# Altium PCB 主板-双BH(1).PcbDoc (part 3 of 13)
Units mm, origin at the board's own origin, x right, y up, seen from the top; angles counter-clockwise.
Board outline 97.69 x 103.45 mm, 2 copper layers (Top Layer, Bottom Layer); 78 components, 75 nets, 243 pads, 279 vias.
Unrouted connection lines stored in the file: 7.
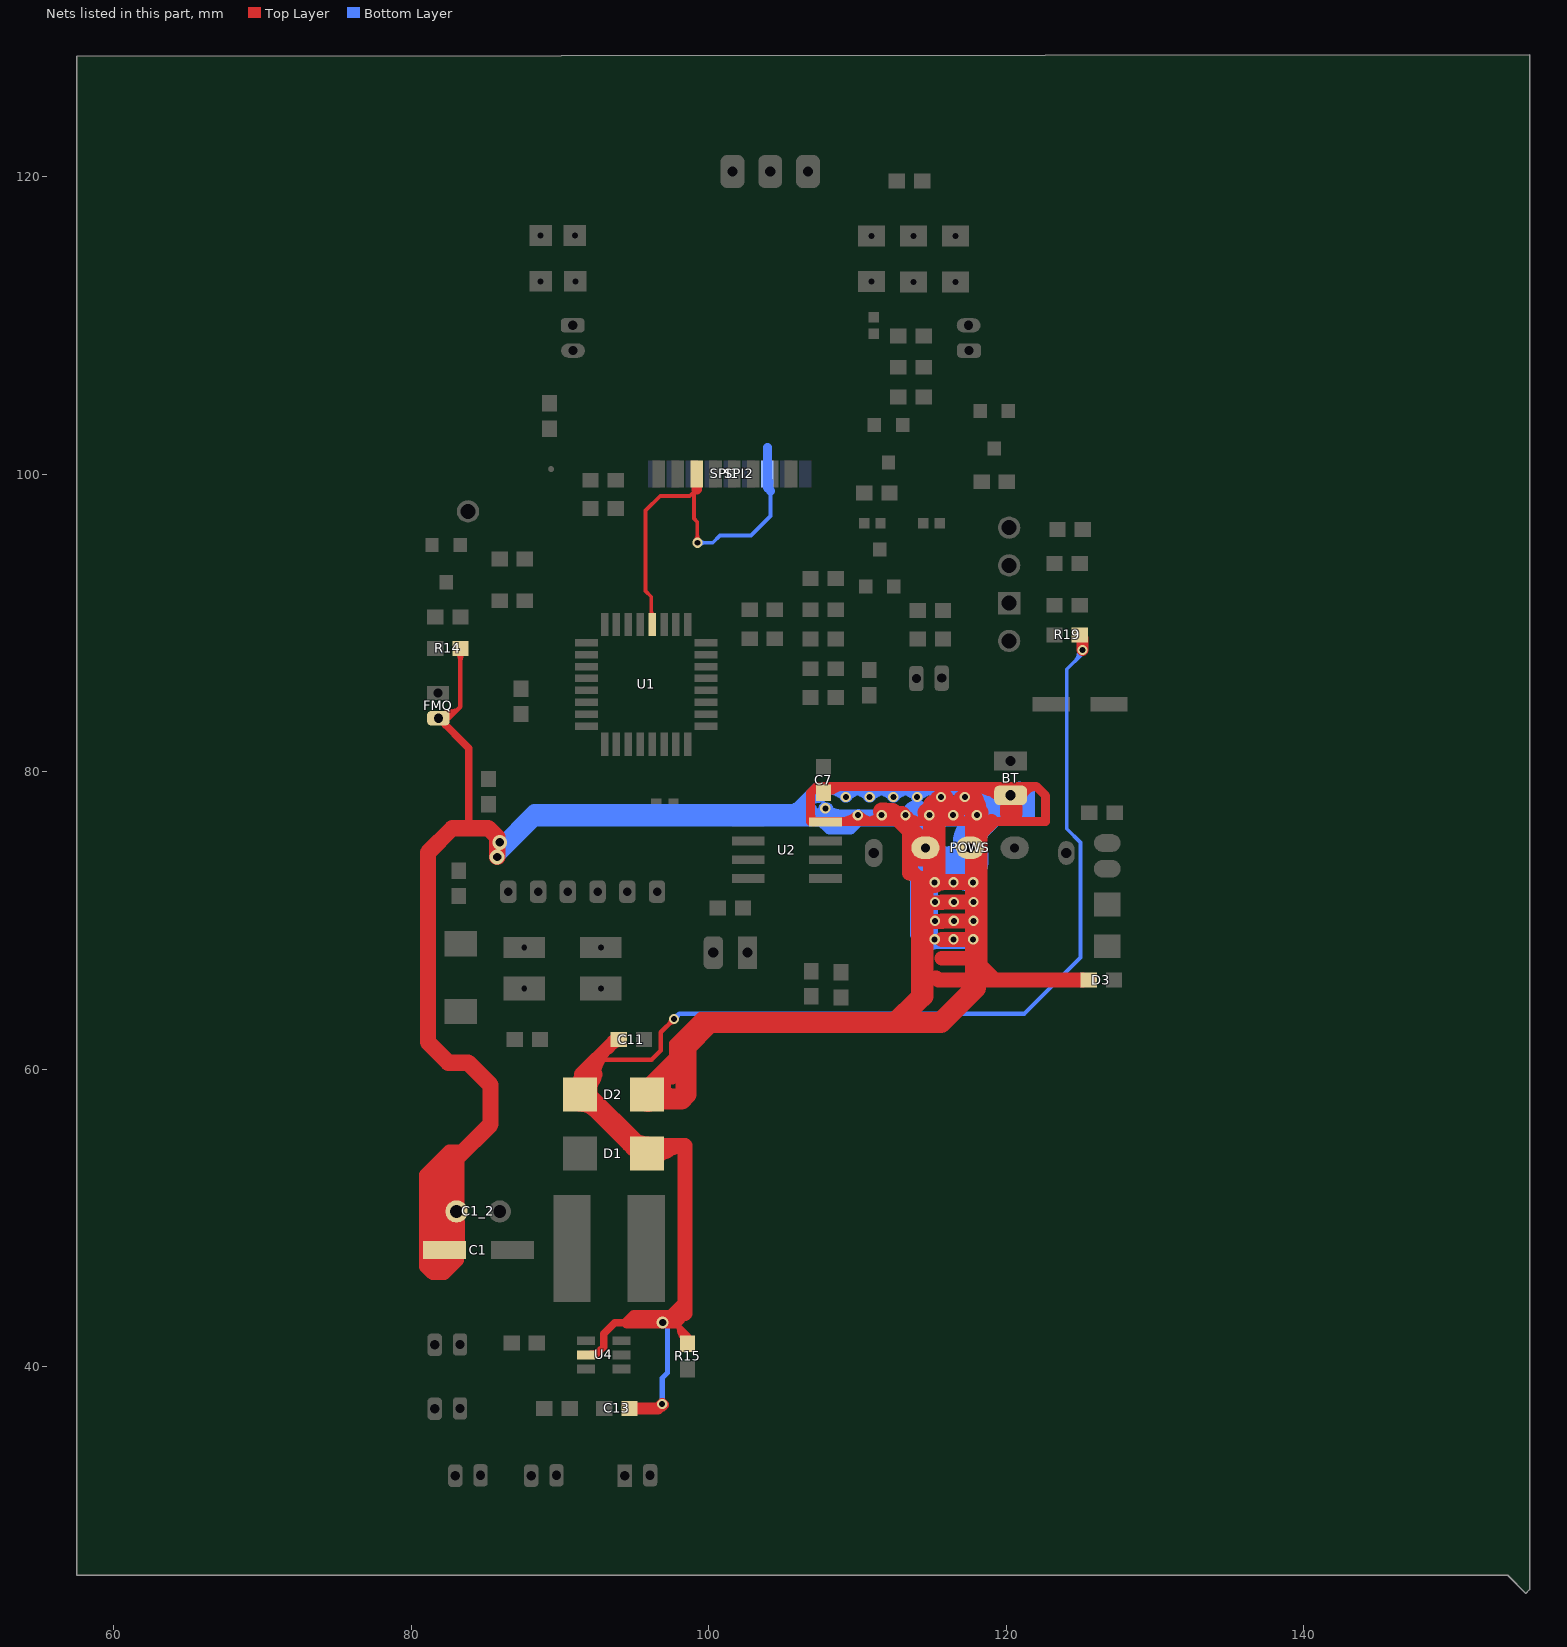
[diagram p3: the nets of this part, all layers, seen from the top]

## Via types
v1: diameter 0.7, hole 0.4, Top Layer to Bottom Layer, 108 vias
v2: diameter 0.68, hole 0.4, Top Layer to Bottom Layer, 87 vias
v3: diameter 0.8, hole 0.5, Top Layer to Bottom Layer, tented both sides, 33 vias
v4: diameter 0.6, hole 0.4, Top Layer to Bottom Layer, 12 vias
v5: diameter 0.9, hole 0.5, Top Layer to Bottom Layer, 8 vias
v6: diameter 0.8, hole 0.5, Top Layer to Bottom Layer, 6 vias
v7: diameter 1, hole 0.75, Top Layer to Bottom Layer, tented both sides, 5 vias
v8: diameter 3.4, hole 2.9, Top Layer to Bottom Layer, 4 vias
v9: diameter 1, hole 0.6, Top Layer to Bottom Layer, tented both sides, 3 vias
v10: diameter 1, hole 0.56, Top Layer to Bottom Layer, tented both sides, 2 vias
v11: diameter 1.1, hole 0.68, Top Layer to Bottom Layer, 2 vias
v12: diameter 0.8, hole 0.4, Top Layer to Bottom Layer, 2 vias
v13: diameter 0.65, hole 0.4, Top Layer to Bottom Layer, tented both sides, 2 vias
v14: diameter 1, hole 0.6, Top Layer to Bottom Layer, tented bottom, 1 vias
v15: diameter 0.7, hole 0.4, Top Layer to Bottom Layer, tented bottom, 1 vias
v16: diameter 0.95, hole 0.5, Top Layer to Bottom Layer, 1 vias
v17: diameter 0.64, hole 0.4, Top Layer to Bottom Layer, 1 vias
v18: diameter 0.62, hole 0.4, Top Layer to Bottom Layer, 1 vias

## Nets (pads, with @x,y where several pads share a name; then routed paths per layer and width w, separated by ;. In a path a pad name is that pad's centre, name@x,y a point inside that pad or via, vN(x,y) a via of type N, cw(c..) or ccw(c..) an arc to the next point about the centre after c; other vN are vias at no path point) (continued)
BT: BT.1 C1.2 C1_2.2 C7.2 D2.2 D3.1 FMQ.2 POWS.2 POWS.3 R14.1 U2.4 | length 983.1
  Top Layer w0.3: FMQ.2@81.661,83.605 82.538,83.605 83.31,84.377 R14.1@83.31,88.366 ; FMQ.2@81.797,83.546 ccw(c81.797,84.827) 82.702,83.922 ; FMQ.2@81.822,83.699 ccw(c81.822,84.98) 82.728,84.074 ; FMQ.2@81.934,83.574 cw(c82.718,83.258) 82.499,84.074 ; FMQ.2@82.025,83.724 ccw(c82.025,85.005) 82.931,84.099 ; R14.1@83.063,88.053 cw(c82.465,87.455) 83.31,87.455 ; R14.1@83.063,88.053 cw(c82.465,87.455) 83.31,87.455 ; R14.1@83.063,88.053 cw(c82.465,87.455) 83.31,87.455 ; 83.31,87.455 cw(c84.155,87.455) R14.1@83.557,88.053 ; 83.31,87.455 cw(c84.155,87.455) R14.1@83.557,88.053 ; 83.31,87.455 cw(c84.155,87.455) R14.1@83.557,88.053 ; FMQ.2@81.909,83.345 cw(c82.693,83.029) 82.474,83.845 ccw(c82.693,83.029) FMQ.2@81.909,83.345
  Top Layer w0.5: FMQ.2@81.9,83.56 83.871,81.589 83.871,76.048 ; 97.257,58.344 97.244,58.331 97.233,58.342 97.233,59.233 97.587,59.233 97.587,59.782 ; 97.587,60.655 97.587,61.747 ; 98.273,61.341 98.273,62.433 97.587,61.747 ; 98.984,63.144 100.076,63.144 100.416,63.144 100.873,63.602 99.441,63.602 97.587,61.747 ; FMQ.2@82.161,83.605 ccw(c82.902,83.605) 82.378,83.082 ; FMQ.2@82.161,83.605 ccw(c82.902,83.605) 82.378,83.082 ; FMQ.2@82.161,83.605 ccw(c82.902,83.605) 82.378,83.082
  Top Layer w0.6: C7.2@107.902,78.561 cw(c108.276,78.377) 108.313,78.792 ; 106.858,77.101 ccw(c107.528,77.101) U2.4@107.054,76.627 ; 106.858,77.101 ccw(c107.528,77.101) U2.4@107.054,76.627 ; 106.858,77.101 ccw(c107.528,77.101) U2.4@107.054,76.627 ; C7.2@107.791,78.838 ccw(c108.1,79.684) 108.55,78.904 ; C7.2@107.791,78.838 ccw(c108.1,79.684) 108.55,78.904 ; C7.2@107.791,78.838 ccw(c108.1,79.684) 108.55,78.904 ; C7.2@107.864,78.509 cw(c109.098,77.275) 109.098,79.019 ; C7.2@107.864,78.509 cw(c109.098,77.275) 109.098,79.019 ; C7.2@107.864,78.509 cw(c109.098,77.275) 109.098,79.019 ; U2.4@108.869,76.657 ccw(c108.869,78.252) v1@109.997,77.124 ; U2.4@108.869,76.657 ccw(c108.869,78.252) v1@109.997,77.124 ; U2.4@108.869,76.657 ccw(c108.869,78.252) v1@109.997,77.124 ; v1@110.068,77.124 ccw(c111.196,78.252) 111.196,76.657 ; v1@110.068,77.124 ccw(c111.196,78.252) 111.196,76.657 ; v1@110.068,77.124 ccw(c111.196,78.252) 111.196,76.657 ; 110.469,76.657 ccw(c110.469,78.252) v1@111.597,77.124 ; 110.469,76.657 ccw(c110.469,78.252) v1@111.597,77.124 ; 110.469,76.657 ccw(c110.469,78.252) v1@111.597,77.124 ; v1@111.668,77.124 ccw(c112.796,78.252) 112.796,76.657 ; v1@111.668,77.124 ccw(c112.796,78.252) 112.796,76.657 ; v1@111.668,77.124 ccw(c112.796,78.252) 112.796,76.657 ; 112.069,76.657 ccw(c112.069,78.252) v1@113.197,77.124 ; 112.069,76.657 ccw(c112.069,78.252) v1@113.197,77.124 ; 112.069,76.657 ccw(c112.069,78.252) v1@113.197,77.124 ; v1@113.268,77.124 ccw(c114.396,78.252) 114.396,76.657 ; v1@113.268,77.124 ccw(c114.396,78.252) 114.396,76.657 ; v1@113.268,77.124 ccw(c114.396,78.252) 114.396,76.657 ; 113.669,76.657 ccw(c113.669,78.252) v1@114.797,77.124 ; 113.669,76.657 ccw(c113.669,78.252) v1@114.797,77.124 ; 113.669,76.657 ccw(c113.669,78.252) v1@114.797,77.124 ; v1@114.868,77.124 ccw(c115.996,78.252) 115.996,76.657 ; v1@114.868,77.124 ccw(c115.996,78.252) 115.996,76.657 ; v1@114.868,77.124 ccw(c115.996,78.252) 115.996,76.657 ; 115.269,76.657 ccw(c115.269,78.252) v1@116.397,77.124 ; 115.269,76.657 ccw(c115.269,78.252) v1@116.397,77.124 ; 115.269,76.657 ccw(c115.269,78.252) v1@116.397,77.124 ; v1@116.468,77.124 ccw(c117.596,78.252) 117.596,76.657 ; v1@116.468,77.124 ccw(c117.596,78.252) 117.596,76.657 ; v1@116.468,77.124 ccw(c117.596,78.252) 117.596,76.657 ; 116.869,76.657 ccw(c116.869,78.252) v1@117.997,77.124 ; 116.869,76.657 ccw(c116.869,78.252) v1@117.997,77.124 ; 116.869,76.657 ccw(c116.869,78.252) v1@117.997,77.124 ; 117.563,79.019 cw(c117.563,76.135) BT.1@119.602,78.175 ; 117.563,79.019 cw(c117.563,76.135) BT.1@119.602,78.175 ; 117.563,79.019 cw(c117.563,76.135) BT.1@119.602,78.175 ; v1@118.072,77.12 ccw(c119.024,77.869) 119.024,76.657 ; v1@118.072,77.12 ccw(c119.024,77.869) 119.024,76.657 ; v1@118.072,77.12 ccw(c119.024,77.869) 119.024,76.657 ; 118.478,78.823 ccw(c119.176,80.032) BT.1@119.715,78.745 ; 118.478,78.823 ccw(c119.176,80.032) BT.1@119.715,78.745 ; 118.478,78.823 ccw(c119.176,80.032) BT.1@119.715,78.745 ; 119.011,79.019 cw(c119.011,77.583) BT.1@120.027,78.599 ; 119.011,79.019 cw(c119.011,77.583) BT.1@120.027,78.599 ; 119.011,79.019 cw(c119.011,77.583) BT.1@120.027,78.599 ; 119.024,76.657 115.164,76.657 113.005,76.657 106.858,76.657 106.858,78.588 107.29,79.019 122.022,79.019 ; 119.024,76.657 122.657,76.657 122.657,78.384 122.022,79.019 ; BT.1@119.361,78.837 cw(c119.606,78.764) BT.1@119.606,79.019 ; BT.1@119.361,78.837 cw(c119.606,78.764) BT.1@119.606,79.019 ; BT.1@119.361,78.837 cw(c119.606,78.764) BT.1@119.606,79.019 ; BT.1@119.936,78.665 cw(c120.411,78.523) BT.1@120.411,79.019 ; BT.1@119.936,78.665 cw(c120.411,78.523) BT.1@120.411,79.019 ; BT.1@119.936,78.665 cw(c120.411,78.523) BT.1@120.411,79.019 ; BT.1@120.51,78.494 cw(c121.216,78.283) BT.1@121.216,79.019 ; BT.1@120.51,78.494 cw(c121.216,78.283) BT.1@121.216,79.019 ; BT.1@120.51,78.494 cw(c121.216,78.283) BT.1@121.216,79.019 ; BT.1@121.085,78.322 cw(c122.022,78.042) 122.022,79.019 ; BT.1@121.085,78.322 cw(c122.022,78.042) 122.022,79.019 ; BT.1@121.085,78.322 cw(c122.022,78.042) 122.022,79.019
  Top Layer w1: C1.2@81.509,47.676 81.61,47.676 81.61,52.578 ; 82.067,47.092 82.067,53.636 ; 82.809,49.602 cw(c83.521,49.602) C1_2.2@83.172,50.224 ; 82.809,51.246 ccw(c83.462,51.246) C1_2.2@83.164,50.664 ; C1.2@83.05,48.336 83.05,47.185 82.194,46.33 81.458,46.33 ; C1_2.2@83.05,49.727 C1_2.2@83.05,50.656 ; 83.515,54.432 82.575,54.432 81.026,52.883 81.026,46.761 81.458,46.33 ; v1@114.859,72.517 115.672,72.517 ; v1@114.884,69.926 115.697,69.926 ; v1@114.884,71.196 115.697,71.196 ; v1@115.164,72.644 117.373,72.644 ; 115.282,66.158 115.44,66 124.395,66 ; 115.672,67.462 117.881,67.462 ; 115.672,68.732 v1(116.459,68.732) v1(117.78,68.732) v1@117.881,68.732 ; 115.672,72.568 v1(116.459,72.568) v1(117.78,72.568) v1@117.881,72.568 ; 115.697,69.977 v1(116.484,69.977) v1(117.805,69.977) v1@117.907,69.977 ; 115.697,71.247 v1(116.484,71.247) v1(117.805,71.247) v1@117.907,71.247 ; 117.373,72.593 v1@117.615,72.834 ; POWS.2@118.012,74.969 cw(c118.634,75.169) 118.172,75.631 ; 119.024,76.657 118.262,75.895 ; D3.1@125.15,66 124.395,66 ; 81.026,46.744 cw(c82.483,46.744) C1.2@81.453,47.774 ; 81.026,46.744 cw(c82.483,46.744) C1.2@81.453,47.774 ; 81.026,46.744 cw(c82.483,46.744) C1.2@81.453,47.774 ; 81.026,48.946 ccw(c82.483,48.946) C1.2@81.453,47.916 ; 81.026,48.946 ccw(c82.483,48.946) C1.2@81.453,47.916 ; 81.026,48.946 ccw(c82.483,48.946) C1.2@81.453,47.916 ; C1.2@81.311,47.916 ccw(c80.589,48.637) 81.61,48.637 ; C1.2@81.311,47.916 ccw(c80.589,48.637) 81.61,48.637 ; C1.2@81.311,47.916 ccw(c80.589,48.637) 81.61,48.637 ; C1.2@81.453,47.775 ccw(c82.183,47.055) 81.458,46.33 ; C1.2@81.453,47.775 ccw(c82.183,47.055) 81.458,46.33 ; C1.2@81.453,47.775 ccw(c82.183,47.055) 81.458,46.33 ; 81.911,49.918 cw(c82.582,49.53) C1_2.2@82.936,50.219 ; 81.911,49.918 cw(c82.582,49.53) C1_2.2@82.936,50.219 ; 81.911,49.918 cw(c82.582,49.53) C1_2.2@82.936,50.219 ; 81.911,50.966 ccw(c82.582,51.353) C1_2.2@82.936,50.664 ; 81.911,50.966 ccw(c82.582,51.353) C1_2.2@82.936,50.664 ; 81.911,50.966 ccw(c82.582,51.353) C1_2.2@82.936,50.664 ; 82.067,47.206 cw(c82.871,47.206) C1.2@82.303,47.774 ; 82.067,47.206 cw(c82.871,47.206) C1.2@82.303,47.774 ; 82.067,47.206 cw(c82.871,47.206) C1.2@82.303,47.774 ; C1.2@82.067,47.466 cw(c86.026,47.466) C1_2.2@83.227,50.265 ; C1.2@82.067,47.466 cw(c86.026,47.466) C1_2.2@83.227,50.265 ; C1.2@82.067,47.466 cw(c86.026,47.466) C1_2.2@83.227,50.265 ; 82.067,48.484 ccw(c82.871,48.484) C1.2@82.303,47.916 ; 82.067,48.484 ccw(c82.871,48.484) C1.2@82.303,47.916 ; 82.067,48.484 ccw(c82.871,48.484) C1.2@82.303,47.916 ; 82.067,49.88 cw(c83.612,49.88) 82.52,50.972 ; 82.067,49.88 cw(c83.612,49.88) 82.52,50.972 ; 82.067,49.88 cw(c83.612,49.88) 82.52,50.972 ; 82.067,51.003 ccw(c83.612,51.003) 82.52,49.911 ; 82.067,51.003 ccw(c83.612,51.003) 82.52,49.911 ; 82.067,51.003 ccw(c83.612,51.003) 82.52,49.911 ; 82.067,53.418 ccw(c86.026,53.418) C1_2.2@83.227,50.619 ; 82.067,53.418 ccw(c86.026,53.418) C1_2.2@83.227,50.619 ; 82.067,53.418 ccw(c86.026,53.418) C1_2.2@83.227,50.619 ; 82.666,49.293 ccw(c81.429,50.007) C1_2.2@82.809,50.377 ; 82.666,49.293 ccw(c81.429,50.007) C1_2.2@82.809,50.377 ; 82.666,49.293 ccw(c81.429,50.007) C1_2.2@82.809,50.377 ; 82.666,51.59 cw(c81.429,50.876) C1_2.2@82.809,50.507 ; 82.666,51.59 cw(c81.429,50.876) C1_2.2@82.809,50.507 ; 82.666,51.59 cw(c81.429,50.876) C1_2.2@82.809,50.507 ; 113.487,73.205 cw(c115.057,73.205) POWS.3@114.468,74.66 ; 113.487,73.205 cw(c115.057,73.205) POWS.3@114.468,74.66 ; 113.487,73.205 cw(c115.057,73.205) POWS.3@114.468,74.66 ; 113.487,74.689 cw(c114.456,74.689) 114.093,75.587 ; 113.487,74.689 cw(c114.456,74.689) 114.093,75.587 ; 113.487,74.689 cw(c114.456,74.689) 114.093,75.587 ; 113.487,75.046 ccw(c114.393,75.046) 114.284,74.147 ; 113.487,75.046 ccw(c114.393,75.046) 114.284,74.147 ; 113.487,75.046 ccw(c114.393,75.046) 114.284,74.147 ; 113.487,76.175 ccw(c114.529,76.175) POWS.3@114.404,75.14 ; 113.487,76.175 ccw(c114.529,76.175) POWS.3@114.404,75.14 ; 113.487,76.175 ccw(c114.529,76.175) POWS.3@114.404,75.14 ; 113.487,76.175 113.487,73.457 114.351,72.593 ; 113.764,74.129 ccw(c113.218,74.853) POWS.3@114.124,74.883 ; 113.764,74.129 ccw(c113.218,74.853) POWS.3@114.124,74.883 ; 113.764,74.129 ccw(c113.218,74.853) POWS.3@114.124,74.883 ; 114.058,72.886 ccw(c115.189,74.018) v1@115.189,72.418 ; 114.058,72.886 ccw(c115.189,74.018) v1@115.189,72.418 ; 114.058,72.886 ccw(c115.189,74.018) v1@115.189,72.418 ; 114.351,72.593 ccw(c114.917,73.16) v1@115.252,72.431 ; 114.351,72.593 ccw(c114.917,73.16) v1@115.252,72.431 ; 114.351,72.593 ccw(c114.917,73.16) v1@115.252,72.431 ; POWS.2@117.597,74.715 cw(c115.991,73.109) 118.262,73.109 ; POWS.2@117.597,74.715 cw(c115.991,73.109) 118.262,73.109 ; POWS.2@117.597,74.715 cw(c115.991,73.109) 118.262,73.109 ; v1@117.615,72.834 117.945,72.834 118.237,73.127 ; v1@117.615,72.834 118.237,73.457 118.237,73.127 ; v1@117.63,72.568 cw(c118.31,72.568) 117.829,73.049 ; v1@117.63,72.568 cw(c118.31,72.568) 117.829,73.049 ; v1@117.63,72.568 cw(c118.31,72.568) 117.829,73.049 ; POWS.2@117.649,75.108 ccw(c116.935,76.345) 118.314,75.975 ; POWS.2@117.649,75.108 ccw(c116.935,76.345) 118.314,75.975 ; POWS.2@117.649,75.108 ccw(c116.935,76.345) 118.314,75.975 ; POWS.2@117.7,75.131 ccw(c117.462,75.895) 118.262,75.895 ; POWS.2@117.7,75.131 ccw(c117.462,75.895) 118.262,75.895 ; POWS.2@117.7,75.131 ccw(c117.462,75.895) 118.262,75.895 ; v1@117.856,72.439 ccw(c117.433,73.152) 118.262,73.152 ; v1@117.856,72.439 ccw(c117.433,73.152) 118.262,73.152 ; v1@117.856,72.439 ccw(c117.433,73.152) 118.262,73.152 ; v1@117.86,72.441 ccw(c117.425,73.127) 118.237,73.127 ; v1@117.86,72.441 ccw(c117.425,73.127) 118.237,73.127 ; v1@117.86,72.441 ccw(c117.425,73.127) 118.237,73.127 ; v1@117.86,72.441 ccw(c117.425,73.127) 118.237,73.127 ; v1@117.86,72.441 ccw(c117.425,73.127) 118.237,73.127 ; v1@117.86,72.441 ccw(c117.425,73.127) 118.237,73.127 ; v1@117.886,68.626 ccw(c117.038,69.474) 118.237,69.474 ; v1@117.886,68.626 ccw(c117.038,69.474) 118.237,69.474 ; v1@117.886,68.626 ccw(c117.038,69.474) 118.237,69.474 ; v1@117.886,68.838 cw(c117.038,67.991) 118.237,67.991 ; v1@117.886,68.838 cw(c117.038,67.991) 118.237,67.991 ; v1@117.886,68.838 cw(c117.038,67.991) 118.237,67.991 ; v1@117.886,72.462 ccw(c117.038,73.309) 118.237,73.309 ; v1@117.886,72.462 ccw(c116.977,73.371) 118.262,73.371 ; v1@117.886,72.462 ccw(c117.038,73.309) 118.237,73.309 ; v1@117.886,72.462 ccw(c116.977,73.371) 118.262,73.371 ; v1@117.886,72.462 ccw(c117.038,73.309) 118.237,73.309 ; v1@117.886,72.462 ccw(c116.977,73.371) 118.262,73.371 ; v1@117.886,72.674 cw(c117.038,71.826) 118.237,71.826 ; v1@117.886,72.674 cw(c117.038,71.826) 118.237,71.826 ; v1@117.886,72.674 cw(c117.038,71.826) 118.237,71.826 ; v1@117.911,69.871 ccw(c117.125,70.657) 118.237,70.657 ; v1@117.911,69.871 ccw(c117.125,70.657) 118.237,70.657 ; v1@117.911,69.871 ccw(c117.125,70.657) 118.237,70.657 ; v1@117.911,70.083 cw(c117.125,69.297) 118.237,69.297 ; v1@117.911,70.083 cw(c117.125,69.297) 118.237,69.297 ; v1@117.911,70.083 cw(c117.125,69.297) 118.237,69.297 ; v1@117.911,71.141 ccw(c117.125,71.927) 118.237,71.927 ; v1@117.911,71.141 ccw(c117.125,71.927) 118.237,71.927 ; v1@117.911,71.141 ccw(c117.125,71.927) 118.237,71.927 ; v1@117.911,71.353 cw(c117.125,70.567) 118.237,70.567 ; v1@117.911,71.353 cw(c117.125,70.567) 118.237,70.567 ; v1@117.911,71.353 cw(c117.125,70.567) 118.237,70.567 ; POWS.2@118.012,74.814 ccw(c119.179,74.432) 118.115,73.818 ; POWS.2@118.012,74.814 ccw(c119.179,74.432) 118.115,73.818 ; POWS.2@118.012,74.814 ccw(c119.179,74.432) 118.115,73.818 ; POWS.2@118.015,74.958 cw(c118.943,75.214) 118.262,75.895 ; POWS.2@118.015,74.958 cw(c118.943,75.214) 118.262,75.895 ; POWS.2@118.015,74.958 cw(c118.943,75.214) 118.262,75.895 ; POWS.2@118.024,74.892 cw(c119.871,74.892) 118.565,76.198 ; POWS.2@118.024,74.892 cw(c119.871,74.892) 118.565,76.198 ; POWS.2@118.024,74.892 cw(c119.871,74.892) 118.565,76.198 ; 118.237,73.127 118.262,73.152 ; 118.237,73.127 118.237,66.98 119.217,66 124.395,66 ; 118.262,73.152 118.262,75.895
  Top Layer w1.1: C1_2.2@83.033,49.727 83.033,54 85.327,56.294 85.327,58.945 83.82,60.452 82.499,60.452 81.128,61.824 81.128,74.574 82.753,76.2 85.192,76.2 85.776,75.616 v10(85.776,74.27) ; C1.2@83.05,47.898 C1_2.2@83.05,49.727
  Top Layer w1.2: 112.166,77.292 112.37,77.292 113.005,76.657 POWS.3@114.174,75.488 ; v1@111.633,77.339 cw(c111.633,75.673) 112.811,76.851 ; v1@111.633,77.339 cw(c111.633,75.673) 112.811,76.851 ; v1@111.633,77.339 cw(c111.633,75.673) 112.811,76.851 ; 112.533,77.129 ccw(c113.233,77.828) v1@113.233,76.839 ; 112.533,77.129 ccw(c113.233,77.828) v1@113.233,76.839 ; 112.533,77.129 ccw(c113.233,77.828) v1@113.233,76.839 ; v1@112.983,77.089 ccw(c113.972,77.089) 113.272,76.389 ; v1@112.983,77.089 ccw(c113.972,77.089) 113.272,76.389 ; v1@112.983,77.089 ccw(c113.972,77.089) 113.272,76.389 ; 113.838,75.824 cw(c112.906,74.892) POWS.3@114.224,74.892 ; 113.838,75.824 cw(c112.906,74.892) POWS.3@114.224,74.892 ; 113.838,75.824 cw(c112.906,74.892) POWS.3@114.224,74.892 ; v1@114.656,77.266 cw(c115.762,76.16) 115.762,77.724 ; v1@114.656,77.266 cw(c115.762,76.16) 115.762,77.724 ; v1@114.656,77.266 cw(c115.762,76.16) 115.762,77.724 ; 115.164,77.724 ccw(c115.164,78.454) v1@115.859,78.232 ; 115.164,77.724 ccw(c115.164,78.454) v1@115.859,78.232 ; 115.164,77.724 ccw(c115.164,78.454) v1@115.859,78.232 ; 115.164,77.724 117.932,77.724 ; v1@115.444,78.131 ccw(c116.428,79.115) 116.428,77.724 ; v1@115.444,78.131 ccw(c116.428,79.115) 116.428,77.724 ; v1@115.444,78.131 ccw(c116.428,79.115) 116.428,77.724 ; 115.503,77.724 cw(c115.503,76.16) v1@116.609,77.266 ; 115.503,77.724 cw(c115.503,76.16) v1@116.609,77.266 ; 115.503,77.724 cw(c115.503,76.16) v1@116.609,77.266 ; v1@116.256,77.266 cw(c117.362,76.16) 117.362,77.724 ; v1@116.256,77.266 cw(c117.362,76.16) 117.362,77.724 ; v1@116.256,77.266 cw(c117.362,76.16) 117.362,77.724 ; 116.414,77.724 ccw(c116.414,79.115) v1@117.398,78.131 ; 116.414,77.724 ccw(c116.414,79.115) v1@117.398,78.131 ; 116.414,77.724 ccw(c116.414,79.115) v1@117.398,78.131 ; v1@117.029,78.149 ccw(c117.932,78.898) 117.932,77.724 ; v1@117.029,78.149 ccw(c117.932,78.898) 117.932,77.724 ; v1@117.029,78.149 ccw(c117.932,78.898) 117.932,77.724 ; 117.103,77.724 cw(c117.103,76.16) v1@118.209,77.266 ; 117.103,77.724 cw(c117.103,76.16) v1@118.209,77.266 ; 117.103,77.724 cw(c117.103,76.16) v1@118.209,77.266
  Top Layer w1.4: D2.2@95.85,58.166 D2.2@95.91,58.166 ; D2.2@95.91,57.836 D2.2@95.91,58.166 ; 98.476,61.544 100.076,63.144 ; 100.416,63.144 112.573,63.144 ; 114.097,64.668 112.573,63.144 ; 117.932,77.724 117.932,65.456 115.621,63.144 112.573,63.144 ; D2.2@95.91,58.166 95.91,58.572 98.476,61.138 98.476,58.318 98.171,58.014 96.063,58.014 D2.2@95.91,58.166 ; D2.2@96.168,58.618 ccw(c97.628,60.078) 97.628,58.014 ; D2.2@96.168,58.618 ccw(c97.628,60.078) 97.628,58.014 ; D2.2@96.168,58.618 ccw(c97.628,60.078) 97.628,58.014 ; D2.2@96.3,58.3 cw(c97.898,58.3) D2.2@96.768,59.43 ; D2.2@96.3,58.3 cw(c97.898,58.3) D2.2@96.768,59.43 ; D2.2@96.3,58.3 cw(c97.898,58.3) D2.2@96.768,59.43 ; v1@117.468,78.556 cw(c116.349,77.436) 117.932,77.436 ; v1@117.468,78.556 cw(c116.349,77.436) 117.932,77.436 ; v1@117.468,78.556 cw(c116.349,77.436) 117.932,77.436 ; v1@117.468,78.556 cw(c116.349,77.436) 117.932,77.436 ; v1@117.468,78.556 cw(c116.349,77.436) 117.932,77.436 ; v1@117.468,78.556 cw(c116.349,77.436) 117.932,77.436
  Top Layer w1.5: 114.351,64.922 114.351,72.593 ; v1@115.164,72.593 115.164,72.644 115.164,76.657 115.164,77.724 ; 120.345,77.216 120.345,77.572 ; POWS.3@114.774,74.892 ccw(c113.833,75.832) 115.164,75.832 ; POWS.3@114.774,74.892 cw(c113.833,73.951) 115.164,73.951 ; POWS.3@114.774,74.892 ccw(c113.833,75.832) 115.164,75.832 ; POWS.3@114.774,74.892 cw(c113.833,73.951) 115.164,73.951 ; POWS.3@114.774,74.892 ccw(c113.833,75.832) 115.164,75.832 ; POWS.3@114.774,74.892 cw(c113.833,73.951) 115.164,73.951
  Bottom Layer w0.8: 105.693,77.27 105.896,77.473 107.34,78.918 117.132,78.918 ; 106.161,77.739 cw(c107.595,76.305) 107.595,78.333 ; 106.829,77.473 107.224,77.079 107.544,76.759 108.128,76.175 109.525,76.175 110.058,76.708 ; v1@110.338,76.987 110.058,76.708 ; 118.389,76.683 118.389,76.708 ; 121.219,77.079 120.828,77.079 119.771,77.079 118.785,77.079 118.415,77.079 ; v1@107.799,77.555 ccw(c108.693,77.4) 108.052,76.759 ; v1@107.799,77.555 ccw(c108.693,77.4) 108.052,76.759 ; v1@107.799,77.555 ccw(c108.693,77.4) 108.052,76.759 ; v1@107.813,77.511 ccw(c108.857,78.554) 108.857,77.079 ; v1@107.813,77.511 ccw(c108.857,78.554) 108.857,77.079 ; v1@107.813,77.511 ccw(c108.857,78.554) 108.857,77.079 ; 107.87,78.918 cw(c107.87,76.957) v1@109.256,78.344 ; 107.87,78.918 cw(c107.87,76.957) v1@109.256,78.344 ; 107.87,78.918 cw(c107.87,76.957) v1@109.256,78.344 ; 108.052,76.759 108.102,76.708 110.058,76.708 ; 108.052,76.759 107.732,77.079 113.995,77.079 118.389,77.079 118.415,77.079 ; v1@109.186,78.344 cw(c110.572,76.957) 110.572,78.918 ; v1@109.186,78.344 cw(c110.572,76.957) 110.572,78.918 ; v1@109.186,78.344 cw(c110.572,76.957) 110.572,78.918 ; 109.233,76.708 ccw(c109.233,77.888) v1@110.068,77.054 ; 109.233,76.708 ccw(c109.233,77.888) v1@110.068,77.054 ; 109.233,76.708 ccw(c109.233,77.888) v1@110.068,77.054 ; 109.47,78.918 cw(c109.47,76.957) v1@110.856,78.344 ; 109.47,78.918 cw(c109.47,76.957) v1@110.856,78.344 ; 109.47,78.918 cw(c109.47,76.957) v1@110.856,78.344 ; 109.83,76.48 ccw(c109.222,77.089) v1@110.083,77.089 ; 109.83,76.48 ccw(c109.222,77.089) v1@110.083,77.089 ; 109.83,76.48 ccw(c109.222,77.089) v1@110.083,77.089 ; v1@109.997,77.054 ccw(c110.832,77.888) 110.832,76.708 ; v1@109.997,77.054 ccw(c110.832,77.888) 110.832,76.708 ; v1@109.997,77.054 ccw(c110.832,77.888) 110.832,76.708 ; 110.058,76.708 113.995,76.708 ; v1@110.786,78.344 cw(c112.172,76.957) 112.172,78.918 ; v1@110.786,78.344 cw(c112.172,76.957) 112.172,78.918 ; v1@110.786,78.344 cw(c112.172,76.957) 112.172,78.918 ; 110.833,76.708 ccw(c110.833,77.888) v1@111.668,77.054 ; 110.833,76.708 ccw(c110.833,77.888) v1@111.668,77.054 ; 110.833,76.708 ccw(c110.833,77.888) v1@111.668,77.054 ; 111.07,78.918 cw(c111.07,76.957) v1@112.456,78.344 ; 111.07,78.918 cw(c111.07,76.957) v1@112.456,78.344 ; 111.07,78.918 cw(c111.07,76.957) v1@112.456,78.344 ; v1@111.597,77.054 ccw(c112.432,77.888) 112.432,76.708 ; v1@111.597,77.054 ccw(c112.432,77.888) 112.432,76.708 ; v1@111.597,77.054 ccw(c112.432,77.888) 112.432,76.708 ; v1@112.386,78.344 cw(c113.772,76.957) 113.772,78.918 ; v1@112.386,78.344 cw(c113.772,76.957) 113.772,78.918 ; v1@112.386,78.344 cw(c113.772,76.957) 113.772,78.918 ; 112.433,76.708 ccw(c112.433,77.888) v1@113.268,77.054 ; 112.433,76.708 ccw(c112.433,77.888) v1@113.268,77.054 ; 112.433,76.708 ccw(c112.433,77.888) v1@113.268,77.054 ; 112.67,78.918 cw(c112.67,76.957) v1@114.056,78.344 ; 112.67,78.918 cw(c112.67,76.957) v1@114.056,78.344 ; 112.67,78.918 cw(c112.67,76.957) v1@114.056,78.344 ; v1@113.196,77.055 ccw(c113.995,77.802) 113.995,76.708 ; v1@113.196,77.055 ccw(c113.995,77.802) 113.995,76.708 ; v1@113.196,77.055 ccw(c113.995,77.802) 113.995,76.708 ; v1@113.986,78.344 cw(c115.372,76.957) 115.372,78.918 ; v1@113.986,78.344 cw(c115.372,76.957) 115.372,78.918 ; v1@113.986,78.344 cw(c115.372,76.957) 115.372,78.918 ; 113.995,76.708 118.389,76.708 ; 114.033,76.708 ccw(c114.033,77.888) v1@114.868,77.054 ; 114.033,76.708 ccw(c114.033,77.888) v1@114.868,77.054 ; 114.033,76.708 ccw(c114.033,77.888) v1@114.868,77.054 ; 114.27,78.918 cw(c114.27,76.957) v1@115.656,78.344 ; 114.27,78.918 cw(c114.27,76.957) v1@115.656,78.344 ; 114.27,78.918 cw(c114.27,76.957) v1@115.656,78.344 ; v1@114.797,77.054 ccw(c115.632,77.888) 115.632,76.708 ; v1@114.797,77.054 ccw(c115.632,77.888) 115.632,76.708 ; v1@114.797,77.054 ccw(c115.632,77.888) 115.632,76.708 ; v1@115.586,78.344 cw(c116.972,76.957) 116.972,78.918 ; v1@115.586,78.344 cw(c116.972,76.957) 116.972,78.918 ; v1@115.586,78.344 cw(c116.972,76.957) 116.972,78.918 ; 115.633,76.708 ccw(c115.633,77.888) v1@116.468,77.054 ; 115.633,76.708 ccw(c115.633,77.888) v1@116.468,77.054 ; 115.633,76.708 ccw(c115.633,77.888) v1@116.468,77.054 ; 115.87,78.918 cw(c115.87,76.957) v1@117.256,78.344 ; 115.87,78.918 cw(c115.87,76.957) v1@117.256,78.344 ; 115.87,78.918 cw(c115.87,76.957) v1@117.256,78.344 ; v1@116.397,77.054 ccw(c117.232,77.888) 117.232,76.708 ; v1@116.397,77.054 ccw(c117.232,77.888) 117.232,76.708 ; v1@116.397,77.054 ccw(c117.232,77.888) 117.232,76.708 ; 117.132,78.918 cw(c116.713,78.499) v1@117.268,78.291 ; 117.132,78.918 cw(c116.713,78.499) v1@117.268,78.291 ; 117.132,78.918 cw(c116.713,78.499) v1@117.268,78.291 ; 117.132,78.918 121.552,78.918 ; 117.132,78.918 118.415,77.635 ; v1@117.186,78.344 cw(c118.572,76.957) 118.572,78.918 ; v1@117.186,78.344 cw(c118.572,76.957) 118.572,78.918 ; v1@117.186,78.344 cw(c118.572,76.957) 118.572,78.918 ; v1@117.221,78.358 cw(c117.221,77.222) 118.025,78.025 ; v1@117.221,78.358 cw(c117.221,77.222) 118.025,78.025 ; v1@117.221,78.358 cw(c117.221,77.222) 118.025,78.025 ; 117.233,76.708 ccw(c117.233,77.888) v1@118.068,77.054 ; 117.233,76.708 ccw(c117.233,77.888) v1@118.068,77.054 ; 117.233,76.708 ccw(c117.233,77.888) v1@118.068,77.054 ; v1@117.234,78.356 cw(c116.957,77.324) 117.883,77.858 ; v1@117.234,78.356 cw(c116.957,77.324) 117.883,77.858 ; v1@117.234,78.356 cw(c116.957,77.324) 117.883,77.858 ; 117.461,78.589 cw(c115.962,77.089) v1@118.083,77.089 ; 117.461,78.589 cw(c115.962,77.089) v1@118.083,77.089 ; 117.461,78.589 cw(c115.962,77.089) v1@118.083,77.089 ; v1@117.983,77.082 ccw(c118.415,77.144) 118.415,76.708 ; v1@117.983,77.082 ccw(c118.415,77.144) 118.415,76.708 ; v1@117.983,77.082 ccw(c118.415,77.144) 118.415,76.708 ; v1@117.983,77.085 ccw(c118.389,77.116) 118.389,76.708 ; v1@117.983,77.085 ccw(c118.389,77.116) 118.389,76.708 ; v1@117.983,77.085 ccw(c118.389,77.116) 118.389,76.708 ; v1@117.983,77.085 ccw(c118.389,77.116) 118.389,76.708 ; v1@117.983,77.085 ccw(c118.389,77.116) 118.389,76.708 ; v1@117.983,77.085 ccw(c118.389,77.116) 118.389,76.708 ; v1@117.986,77.072 ccw(c118.436,77.233) 118.436,76.755 ; v1@117.986,77.072 ccw(c118.436,77.233) 118.436,76.755 ; v1@117.986,77.072 ccw(c118.436,77.233) 118.436,76.755 ; v1@117.987,77.07 ccw(c118.462,77.271) 118.462,76.755 ; v1@117.987,77.07 ccw(c118.462,77.271) 118.462,76.755 ; v1@117.987,77.07 ccw(c118.462,77.271) 118.462,76.755 ; v1@117.987,77.07 ccw(c118.462,77.271) 118.462,76.755 ; v1@117.987,77.07 ccw(c118.462,77.271) 118.462,76.755 ; v1@117.987,77.07 ccw(c118.462,77.271) 118.462,76.755 ; v1@117.997,77.054 ccw(c118.719,77.775) 118.719,76.755 ; v1@117.997,77.054 ccw(c118.719,77.775) 118.719,76.755 ; v1@117.997,77.054 ccw(c118.719,77.775) 118.719,76.755 ; v1@118.04,77.139 cw(c117.979,76.707) 118.415,76.707 ; v1@118.04,77.139 cw(c117.979,76.707) 118.415,76.707 ; v1@118.04,77.139 cw(c117.979,76.707) 118.415,76.707 ; v1@118.04,77.139 cw(c117.979,76.707) 118.415,76.707 ; v1@118.04,77.139 cw(c117.979,76.707) 118.415,76.707 ; v1@118.04,77.139 cw(c117.979,76.707) 118.415,76.707 ; 118.049,78.918 cw(c118.049,76.621) BT.1@119.673,78.245 ; 118.049,78.918 cw(c118.049,76.621) BT.1@119.673,78.245 ; 118.049,78.918 cw(c118.049,76.621) BT.1@119.673,78.245 ; v1@118.054,77.134 cw(c117.789,76.567) 118.415,76.567 ; v1@118.054,77.134 cw(c117.789,76.567) 118.415,76.567 ; v1@118.054,77.134 cw(c117.789,76.567) 118.415,76.567 ; v1@118.054,77.134 cw(c117.789,76.567) 118.415,76.567 ; v1@118.054,77.134 cw(c117.789,76.567) 118.415,76.567 ; v1@118.054,77.134 cw(c117.789,76.567) 118.415,76.567 ; v1@118.056,77.045 ccw(c117.75,77.635) 118.415,77.635 ; v1@118.056,77.045 ccw(c117.75,77.635) 118.415,77.635 ; v1@118.056,77.045 ccw(c117.75,77.635) 118.415,77.635 ; v1@118.055,77.134 cw(c117.76,76.549) 118.415,76.549 ; v1@118.055,77.134 cw(c117.76,76.549) 118.415,76.549 ; v1@118.055,77.134 cw(c117.76,76.549) 118.415,76.549 ; v1@118.057,77.133 cw(c117.742,76.567) 118.389,76.567 ; v1@118.057,77.133 cw(c117.742,76.567) 118.389,76.567 ; v1@118.057,77.133 cw(c117.742,76.567) 118.389,76.567 ; v1@118.058,77.132 cw(c117.709,76.548) 118.389,76.548 ; v1@118.058,77.132 cw(c117.709,76.548) 118.389,76.548 ; v1@118.058,77.132 cw(c117.709,76.548) 118.389,76.548 ; 118.389,76.708 118.415,76.733 ; 118.389,76.708 118.415,76.708 ; 118.415,76.708 118.415,76.733 ; 118.415,76.733 118.436,76.755 ; 118.415,76.733 118.415,77.079 ; 118.415,77.079 118.415,77.635 ; 118.436,76.755 118.462,76.755 ; 118.462,76.755 120.735,76.755 120.752,76.771 121.026,76.771 121.552,77.297 121.552,78.918 ; 118.765,78.77 ccw(c119.394,79.859) BT.1@119.774,78.66 ; 118.765,78.77 ccw(c119.394,79.859) BT.1@119.774,78.66 ; 118.765,78.77 ccw(c119.394,79.859) BT.1@119.774,78.66 ; BT.1@120.683,78.181 cw(c120.369,77.041) 121.552,77.041 ; BT.1@120.683,78.181 cw(c120.369,77.041) 121.552,77.041 ; BT.1@120.683,78.181 cw(c120.369,77.041) 121.552,77.041 ; BT.1@120.896,78.952 cw(c120.659,78.091) 121.552,78.091 ; BT.1@120.896,78.952 cw(c120.659,78.091) 121.552,78.091 ; BT.1@120.896,78.952 cw(c120.659,78.091) 121.552,78.091 ; BT.1@120.999,78.404 cw(c121.552,78.364) 121.552,78.918 ; BT.1@120.999,78.404 cw(c121.552,78.364) 121.552,78.918 ; BT.1@120.999,78.404 cw(c121.552,78.364) 121.552,78.918
  Bottom Layer w0.9: 106.829,77.473 105.896,77.473 105.824,77.401 88.279,77.401 85.776,74.898 v10(85.776,74.27) ; 107.732,77.079 107.224,77.079 ; 108.636,76.759 108.052,76.759 107.544,76.759 88.265,76.759 v10(85.776,74.27) ; v10(85.776,74.27) ccw(c85.204,74.841) v10@85.91,75.236 ; v10(85.776,74.27) ccw(c85.204,74.841) v10@85.91,75.236 ; v10(85.776,74.27) ccw(c85.204,74.841) v10@85.91,75.236 ; v10@85.776,74.71 cw(c86.504,74.71) v10@85.989,75.225 ; v10@85.776,74.71 cw(c86.504,74.71) v10@85.989,75.225 ; v10@85.776,74.71 cw(c86.504,74.71) v10@85.989,75.225 ; v10@85.826,74.27 cw(c87.463,74.27) v10@86.305,75.427 ; v10@85.826,74.27 cw(c87.463,74.27) v10@86.305,75.427 ; v10@85.826,74.27 cw(c87.463,74.27) v10@86.305,75.427 ; v10@85.954,75.31 ccw(c85.954,77.393) 87.426,75.92 ; v10@85.954,75.31 ccw(c85.954,77.393) 87.426,75.92 ; v10@85.954,75.31 ccw(c85.954,77.393) 87.426,75.92 ; 107.224,77.079 ccw(c107.224,77.893) v1@107.936,77.498 ; 107.224,77.079 ccw(c107.224,77.893) v1@107.936,77.498 ; 107.224,77.079 ccw(c107.224,77.893) v1@107.936,77.498
  Bottom Layer w1: 114.935,72.314 114.935,68.758 114.351,68.758 ; 115.913,74.482 cw(c116.119,75.895) POWS.3@114.974,75.041 ; 116.225,74.511 ccw(c116.055,75.929) POWS.2@117.177,75.046 ; 118.389,76.683 118.212,76.505 ; 118.389,76.708 118.389,77.079 118.389,77.14 ; 114.046,69.063 114.046,73 117.348,73 ; 114.046,69.063 114.531,68.578 118.212,68.578 118.212,76.505 ; 114.046,69.063 114.351,68.758 ; 114.058,69.051 ccw(c115.189,70.183) v1@115.189,68.582 ; 114.058,69.051 ccw(c115.189,70.183) v1@115.189,68.582 ; 114.058,69.051 ccw(c115.189,70.183) v1@115.189,68.582 ; 114.058,69.051 ccw(c115.189,70.183) v1@115.189,68.582 ; 114.058,69.051 ccw(c115.189,70.183) v1@115.189,68.582 ; 114.058,69.051 ccw(c115.189,70.183) v1@115.189,68.582 ; POWS.3@114.173,74.443 ccw(c115.684,75.571) 115.684,73.685 ; POWS.3@114.173,74.443 ccw(c115.684,75.571) 115.684,73.685 ; POWS.3@114.173,74.443 ccw(c115.684,75.571) 115.684,73.685 ; 114.351,68.758 ccw(c114.917,69.324) v1@115.252,68.596 ; 114.351,68.758 ccw(c114.917,69.324) v1@115.252,68.596 ; 114.351,68.758 ccw(c114.917,69.324) v1@115.252,68.596 ; 114.376,73.685 ccw(c114.376,77.249) POWS.2@117.177,75.046 ; 114.376,73.685 ccw(c114.376,77.249) POWS.2@117.177,75.046 ; 114.376,73.685 ccw(c114.376,77.249) POWS.2@117.177,75.046 ; 114.376,73.685 117.678,73.685 ; 114.509,73 cw(c114.509,71.887) v1@115.295,72.674 ; 114.509,73 cw(c114.509,71.887) v1@115.295,72.674 ; 114.509,73 cw(c114.509,71.887) v1@115.295,72.674 ; POWS.3@114.803,74.644 cw(c114.971,73.225) 115.855,74.347 ; POWS.3@114.803,74.644 cw(c114.971,73.225) 115.855,74.347 ; POWS.3@114.803,74.644 cw(c114.971,73.225) 115.855,74.347 ; 114.935,68.983 ccw(c115.44,68.983) v1@115.083,68.626 ; 114.935,68.983 ccw(c115.44,68.983) v1@115.083,68.626 ; 114.935,68.983 ccw(c115.44,68.983) v1@115.083,68.626 ; 114.935,69.665 cw(c115.527,69.665) v1@115.108,70.083 ; 114.935,69.665 cw(c115.527,69.665) v1@115.108,70.083 ; 114.935,69.665 cw(c115.527,69.665) v1@115.108,70.083 ; 114.935,70.289 ccw(c115.527,70.289) v1@115.108,69.871 ; 114.935,70.289 ccw(c115.527,70.289) v1@115.108,69.871 ; 114.935,70.289 ccw(c115.527,70.289) v1@115.108,69.871 ; 114.935,70.935 cw(c115.527,70.935) v1@115.108,71.353 ; 114.935,70.935 cw(c115.527,70.935) v1@115.108,71.353 ; 114.935,70.935 cw(c115.527,70.935) v1@115.108,71.353 ; 114.935,71.559 ccw(c115.527,71.559) v1@115.108,71.141 ; 114.935,71.559 ccw(c115.527,71.559) v1@115.108,71.141 ; 114.935,71.559 ccw(c115.527,71.559) v1@115.108,71.141 ; 114.935,72.317 cw(c115.44,72.317) v1@115.083,72.674 ; 114.935,72.317 cw(c115.44,72.317) v1@115.083,72.674 ; 114.935,72.317 cw(c115.44,72.317) v1@115.083,72.674 ; POWS.3@114.974,75.041 ccw(c117.678,77.059) 117.678,73.685 ; POWS.3@114.974,75.041 ccw(c117.678,77.059) 117.678,73.685 ; POWS.3@114.974,75.041 ccw(c117.678,77.059) 117.678,73.685 ; v1@115.083,72.674 cw(c115.869,71.887) 115.869,73 ; v1@115.083,72.674 cw(c115.869,71.887) 115.869,73 ; v1@115.083,72.674 cw(c115.869,71.887) 115.869,73 ; 115.779,73 cw(c115.779,71.887) v1@116.565,72.674 ; 115.779,73 cw(c115.779,71.887) v1@116.565,72.674 ; 115.779,73 cw(c115.779,71.887) v1@116.565,72.674 ; 116.279,74.374 cw(c117.135,73.231) POWS.2@117.338,74.644 ; 116.279,74.374 cw(c117.135,73.231) POWS.2@117.338,74.644 ; 116.279,74.374 cw(c117.135,73.231) POWS.2@117.338,74.644 ; v1@116.353,72.674 cw(c117.139,71.887) 117.139,73 ; v1@116.353,72.674 cw(c117.139,71.887) 117.139,73 ; v1@116.353,72.674 cw(c117.139,71.887) 117.139,73 ; 116.435,73.685 ccw(c116.435,75.63) POWS.2@117.964,74.428 ; 116.435,73.685 ccw(c116.435,75.63) POWS.2@117.964,74.428 ; 116.435,73.685 ccw(c116.435,75.63) POWS.2@117.964,74.428 ; 116.988,73.697 ccw(c116.522,74.319) POWS.2@117.167,74.752 ; 116.988,73.697 ccw(c116.522,74.319) POWS.2@117.167,74.752 ; 116.988,73.697 ccw(c116.522,74.319) POWS.2@117.167,74.752 ; 117.099,73 cw(c117.099,71.887) v1@117.886,72.674 ; 117.099,73 cw(c117.099,71.887) v1@117.886,72.674 ; 117.099,73 cw(c117.099,71.887) v1@117.886,72.674 ; 117.348,73 cw(c117.348,72.378) v1@117.917,72.628 ; 117.348,73 cw(c117.348,72.378) v1@117.917,72.628 ; 117.348,73 cw(c117.348,72.378) v1@117.917,72.628 ; POWS.2@117.597,74.715 cw(c116.114,73.232) 118.212,73.232 ; POWS.2@117.597,74.715 cw(c116.114,73.232) 118.212,73.232 ; POWS.2@117.597,74.715 cw(c116.114,73.232) 118.212,73.232 ; POWS.2@117.601,75.072 ccw(c116.226,76.505) 118.212,76.505 ; POWS.2@117.601,75.072 ccw(c116.226,76.505) 118.212,76.505 ; POWS.2@117.601,75.072 ccw(c116.226,76.505) 118.212,76.505 ; v1@117.886,68.626 ccw(c117.099,69.413) 118.212,69.413 ; v1@117.886,68.626 ccw(c117.099,69.413) 118.212,69.413 ; v1@117.886,68.626 ccw(c117.099,69.413) 118.212,69.413 ; v1@117.886,72.462 ccw(c117.099,73.248) 118.212,73.248 ; v1@117.886,72.462 ccw(c117.099,73.248) 118.212,73.248 ; v1@117.886,72.462 ccw(c117.099,73.248) 118.212,73.248 ; v1@117.886,72.674 cw(c117.099,71.887) 118.212,71.887 ; v1@117.886,72.674 cw(c117.099,71.887) 118.212,71.887 ; v1@117.886,72.674 cw(c117.099,71.887) 118.212,71.887 ; v1@117.911,69.871 ccw(c117.186,70.596) 118.212,70.596 ; v1@117.911,69.871 ccw(c117.186,70.596) 118.212,70.596 ; v1@117.911,69.871 ccw(c117.186,70.596) 118.212,70.596 ; v1@117.911,70.083 cw(c117.186,69.358) 118.212,69.358 ; v1@117.911,70.083 cw(c117.186,69.358) 118.212,69.358 ; v1@117.911,70.083 cw(c117.186,69.358) 118.212,69.358 ; v1@117.911,71.141 ccw(c117.186,71.866) 118.212,71.866 ; v1@117.911,71.141 ccw(c117.186,71.866) 118.212,71.866 ; v1@117.911,71.141 ccw(c117.186,71.866) 118.212,71.866 ; v1@117.911,71.353 cw(c117.186,70.628) 118.212,70.628 ; v1@117.911,71.353 cw(c117.186,70.628) 118.212,70.628 ; v1@117.911,71.353 cw(c117.186,70.628) 118.212,70.628 ; POWS.2@118.005,74.989 cw(c118.876,75.354) 118.067,75.843 ; POWS.2@118.005,74.989 cw(c118.876,75.354) 118.067,75.843 ; POWS.2@118.005,74.989 cw(c118.876,75.354) 118.067,75.843 ; POWS.2@118.006,74.799 ccw(c118.967,74.413) 118.07,73.896 ; POWS.2@118.006,74.799 ccw(c118.967,74.413) 118.07,73.896 ; POWS.2@118.006,74.799 ccw(c118.967,74.413) 118.07,73.896 ; v1@118.107,77.219 cw(c117.828,76.732) 118.389,76.732 ; v1@118.107,77.219 cw(c117.828,76.732) 118.389,76.732 ; v1@118.107,77.219 cw(c117.828,76.732) 118.389,76.732 ; v1@118.107,77.219 cw(c117.828,76.732) 118.389,76.732 ; v1@118.107,77.219 cw(c117.828,76.732) 118.389,76.732 ; v1@118.107,77.219 cw(c117.828,76.732) 118.389,76.732 ; v1@118.139,77.195 cw(c117.533,76.59) 118.389,76.59 ; v1@118.139,77.195 cw(c117.533,76.59) 118.389,76.59 ; v1@118.139,77.195 cw(c117.533,76.59) 118.389,76.59
  Bottom Layer w1.3: 118.608,78.537 118.461,78.389 ; 119.771,77.079 119.278,77.572 118.461,78.389 ; 120.828,77.079 120.828,77.47 ; 118.461,78.389 cw(c119.172,77.678) BT.1@119.85,78.422 ; 118.461,78.389 cw(c119.172,77.678) BT.1@119.85,78.422 ; 118.461,78.389 cw(c119.172,77.678) BT.1@119.85,78.422
  Bottom Layer w2: 113.995,77.114 113.995,77.079 113.995,76.708 113.995,73.609 114.605,73 ; 118.212,76.505 117.729,76.022 ; 118.389,76.683 118.415,76.708 118.462,76.755 118.785,77.079 119.278,77.572 BT.1@119.99,78.283 ; POWS.3@114.36,75.021 ccw(c115.772,74.166) 114.605,73 ; POWS.3@114.36,75.021 ccw(c115.772,74.166) 114.605,73 ; POWS.3@114.36,75.021 ccw(c115.772,74.166) 114.605,73 ; 117.348,73 ccw(c116.185,74.163) POWS.2@117.587,75.023 ; 117.348,73 ccw(c116.185,74.163) POWS.2@117.587,75.023 ; 117.348,73 ccw(c116.185,74.163) POWS.2@117.587,75.023 ; 117.348,73 117.729,73.381 117.729,76.022 ; POWS.2@117.524,74.892 cw(c119.758,74.892) 118.178,76.472 ; POWS.2@117.524,74.892 cw(c119.758,74.892) 118.178,76.472 ; POWS.2@117.524,74.892 cw(c119.758,74.892) 118.178,76.472 ; POWS.2@117.556,74.77 cw(c118.47,75.282) 117.729,76.022 ; POWS.2@117.556,74.77 cw(c118.47,75.282) 117.729,76.022 ; POWS.2@117.556,74.77 cw(c118.47,75.282) 117.729,76.022
  other v1: 115.189,68.732 115.214,69.977 115.214,71.247 115.189,72.568 110.033,77.089 111.633,77.089 113.233,77.089 114.833,77.089 116.433,77.089 118.033,77.089 107.848,77.546 109.221,78.308 110.821,78.308 112.421,78.308 114.021,78.308 115.621,78.308 117.221,78.308
  other v10: 85.954,75.26
BTJC: 
C-84: C11.1 C13.1 D1.2 D2.1 R15.1 R19.1 U4.5 | length 229.7
  Top Layer w0.3: D2.1@91.35,58.887 91.599,59.136 91.77,58.965 91.77,60.223 ; v6@97.104,43.18 97.561,43.18 ; v2(97.663,63.373) 96.774,62.484 96.774,61.265 96.164,60.655 92.202,60.655 91.77,60.223 ; R15.1@98.241,41.689 ccw(c97.841,41.806) 98.136,42.101 ccw(c98.526,42.491) R15.1@98.557,41.94 ; 98.628,42.113 97.561,43.18 ; D2.1@91.056,59.256 ccw(c90.758,60.223) 91.77,60.223 ; D2.1@91.056,59.256 ccw(c90.758,60.223) 91.77,60.223 ; D2.1@91.056,59.256 ccw(c90.758,60.223) 91.77,60.223 ; D2.1@91.144,58.969 ccw(c90.883,59.817) 91.77,59.817 ; D2.1@91.144,58.969 ccw(c90.883,59.817) 91.77,59.817 ; D2.1@91.144,58.969 ccw(c90.883,59.817) 91.77,59.817 ; D2.1@91.232,58.682 ccw(c91.008,59.411) D2.1@91.77,59.411 ; D2.1@91.232,58.682 ccw(c91.008,59.411) D2.1@91.77,59.411 ; D2.1@91.232,58.682 ccw(c91.008,59.411) D2.1@91.77,59.411 ; 91.77,59.7 ccw(c92.75,59.7) D2.1@92.057,59.007 ; 91.77,59.7 ccw(c92.75,59.7) D2.1@92.057,59.007 ; 91.77,59.7 ccw(c92.75,59.7) D2.1@92.057,59.007 ; v6@97.134,42.887 cw(c97.561,42.722) 97.561,43.18 ; v6@97.134,42.887 cw(c97.561,42.722) 97.561,43.18 ; v6@97.134,42.887 cw(c97.561,42.722) 97.561,43.18 ; 97.339,63.049 ccw(c97.014,63.373) v2@97.473,63.373 ; 97.339,63.049 cw(c97.663,62.724) v2@97.663,63.183 ; 97.339,63.049 ccw(c97.014,63.373) v2@97.473,63.373 ; 97.339,63.049 cw(c97.663,62.724) v2@97.663,63.183 ; 97.339,63.049 ccw(c97.014,63.373) v2@97.473,63.373 ; 97.339,63.049 cw(c97.663,62.724) v2@97.663,63.183 ; 97.575,43.167 cw(c95.999,41.591) R15.1@98.227,41.591 ; 97.575,43.167 cw(c95.999,41.591) R15.1@98.227,41.591 ; 97.575,43.167 cw(c95.999,41.591) R15.1@98.227,41.591 ; 98.008,42.408 ccw(c99.24,42.738) R15.1@98.602,41.634 ; 98.008,42.408 ccw(c99.24,42.738) R15.1@98.602,41.634 ; 98.008,42.408 ccw(c99.24,42.738) R15.1@98.602,41.634 ; 98.087,42.655 cw(c97.023,41.591) R15.1@98.527,41.591 ; 98.087,42.655 cw(c97.023,41.591) R15.1@98.527,41.591 ; 98.087,42.655 cw(c97.023,41.591) R15.1@98.527,41.591 ; R15.1@98.274,41.766 ccw(c97.685,42.106) 98.342,42.282 ; R15.1@98.274,41.766 ccw(c97.685,42.106) 98.342,42.282 ; R15.1@98.274,41.766 ccw(c97.685,42.106) 98.342,42.282 ; 98.304,42.424 ccw(c99.087,42.634) R15.1@98.731,41.905 ; 98.304,42.424 ccw(c99.087,42.634) R15.1@98.731,41.905 ; 98.304,42.424 ccw(c99.087,42.634) R15.1@98.731,41.905 ; 98.599,42.142 cw(c98.047,41.591) R15.1@98.827,41.591 ; 98.599,42.142 cw(c98.047,41.591) R15.1@98.827,41.591 ; 98.599,42.142 cw(c98.047,41.591) R15.1@98.827,41.591
  Top Layer w0.5: D2.1@91.35,58.166 D2.1@91.77,58.166 ; U4.5@91.75,40.8 92.413,40.8 92.939,41.326 92.939,42.215 93.685,42.961 94.513,42.961 ; D1.2@95.506,54.43 D1.2@95.85,54.43 ; U4.5@92.055,40.845 ccw(c92.055,41.818) 92.743,41.13 ; U4.5@92.055,40.845 ccw(c92.055,41.818) 92.743,41.13 ; U4.5@92.055,40.845 ccw(c92.055,41.818) 92.743,41.13
  Top Layer w0.8: D2.1@91.35,58.166 91.35,58.887 91.35,59.688 ; C11.1@93.95,62 93.662,62 91.35,59.688 ; C13.1@94.68,37.2 96.585,37.2 v2(96.876,37.49) ; 97.896,43.429 97.444,42.977 v6(96.901,42.977) ; 98.4,43.586 97.774,42.961 94.513,42.961 94.982,43.429 97.455,43.429 ; 98.4,44.374 97.455,43.429 ; v2(125.146,88.189) R19.1@125.146,89 ; D2.1@90.939,58.927 ccw(c90.441,59.688) 91.35,59.688 ; D2.1@90.939,58.927 ccw(c90.441,59.688) 91.35,59.688 ; D2.1@90.939,58.927 ccw(c90.441,59.688) 91.35,59.688 ; D2.1@91.01,58.968 ccw(c90.388,60.189) 91.711,59.834 ; D2.1@91.01,58.968 ccw(c90.388,60.189) 91.711,59.834 ; D2.1@91.01,58.968 ccw(c90.388,60.189) 91.711,59.834 ; D2.1@91.3,58.3 cw(c94.53,58.3) 92.246,60.584 ; D2.1@91.3,58.3 cw(c94.53,58.3) 92.246,60.584 ; D2.1@91.3,58.3 cw(c94.53,58.3) 92.246,60.584 ; 91.35,59.688 ccw(c92.259,59.688) D2.1@91.761,58.927 ; 91.35,59.688 ccw(c92.259,59.688) D2.1@91.761,58.927 ; 91.35,59.688 ccw(c92.259,59.688) D2.1@91.761,58.927 ; D2.1@91.375,58.257 ccw(c90.199,60.294) 92.471,59.685 ; D2.1@91.375,58.257 ccw(c90.199,60.294) 92.471,59.685 ; D2.1@91.375,58.257 ccw(c90.199,60.294) 92.471,59.685 ; 91.711,59.834 ccw(c92.874,59.523) D2.1@91.935,58.769 ; 91.711,59.834 ccw(c92.874,59.523) D2.1@91.935,58.769 ; 91.711,59.834 ccw(c92.874,59.523) D2.1@91.935,58.769 ; D2.1@92.1,58.3 cw(c97.262,58.3) C11.1@93.612,61.95 ; D2.1@92.1,58.3 cw(c97.262,58.3) C11.1@93.612,61.95 ; D2.1@92.1,58.3 cw(c97.262,58.3) C11.1@93.612,61.95 ; 93.314,61.434 cw(c94.187,60.93) C11.1@93.926,61.903 ; 93.314,61.434 cw(c94.187,60.93) C11.1@93.926,61.903 ; 93.314,61.434 cw(c94.187,60.93) C11.1@93.926,61.903 ; 93.314,61.434 cw(c94.187,60.93) C11.1@93.926,61.903 ; 93.314,61.434 cw(c94.187,60.93) C11.1@93.926,61.903 ; 93.314,61.434 cw(c94.187,60.93) C11.1@93.926,61.903 ; 93.323,61.661 cw(c93.9,61.084) C11.1@93.9,61.9 ; 93.323,61.661 cw(c93.9,61.084) C11.1@93.9,61.9 ; 93.323,61.661 cw(c93.9,61.084) C11.1@93.9,61.9 ; 95.809,43.429 cw(c95.809,41.885) v6(96.901,42.977) ; 95.809,43.429 cw(c95.809,41.885) v6(96.901,42.977) ; 95.809,43.429 cw(c95.809,41.885) v6(96.901,42.977) ; 96.319,37.2 ccw(c96.319,38.047) v2@96.918,37.448 ; 96.319,37.2 ccw(c96.319,38.047) v2@96.918,37.448 ; 96.319,37.2 ccw(c96.319,38.047) v2@96.918,37.448 ; v6(96.901,42.977) cw(c97.455,42.864) 97.455,43.429 ; v6(96.901,42.977) ccw(c96.901,44.288) 97.828,43.361 ; v6(96.901,42.977) cw(c97.455,42.864) 97.455,43.429 ; v6(96.901,42.977) ccw(c96.901,44.288) 97.828,43.361 ; v6(96.901,42.977) cw(c97.455,42.864) 97.455,43.429 ; v6(96.901,42.977) ccw(c96.901,44.288) 97.828,43.361 ; R19.1@124.929,89.129 cw(c124.407,88.607) 125.146,88.607 ; R19.1@124.929,89.129 cw(c124.407,88.607) 125.146,88.607 ; R19.1@124.929,89.129 cw(c124.407,88.607) 125.146,88.607
  Top Layer w1: D1.2@95.072,54.864 98.4,54.864 ; 98.4,43.586 98.4,54.864 ; D1.2@96.347,53.911 cw(c98.399,52.177) 98.399,54.864 ; D1.2@96.347,53.911 cw(c98.399,52.177) 98.399,54.864 ; D1.2@96.347,53.911 cw(c98.399,52.177) 98.399,54.864 ; D1.2@96.37,54.721 ccw(c96.911,55.128) 97.297,54.572 ; D1.2@96.37,54.721 ccw(c96.911,55.128) 97.297,54.572 ; D1.2@96.37,54.721 ccw(c96.911,55.128) 97.297,54.572
  Top Layer w1.5: D2.1@91.77,58.166 D1.2@95.072,54.864 ; D2.1@91.35,57.9 cw(c91.35,56.243) 92.521,57.415 ; D2.1@91.35,57.9 cw(c91.35,56.243) 92.521,57.415 ; D2.1@91.35,57.9 cw(c91.35,56.243) 92.521,57.415 ; D1.2@94.751,55.186 ccw(c95.85,56.285) D1.2@95.85,54.73 ; D1.2@94.751,55.186 ccw(c95.85,56.285) D1.2@95.85,54.73 ; D1.2@94.751,55.186 ccw(c95.85,56.285) D1.2@95.85,54.73
  Bottom Layer w0.254: 121.202,63.721 124.993,67.513 124.993,75.257 124.079,76.171 124.079,86.893 v2@125.146,87.96 ; 124.621,87.435 ccw(c123.867,88.189) v2@124.933,88.189 ; 124.621,87.435 ccw(c123.867,88.189) v2@124.933,88.189 ; 124.621,87.435 ccw(c123.867,88.189) v2@124.933,88.189 ; 124.849,87.876 cw(c125.389,87.731) v2@125.127,88.225 ; 124.849,87.876 cw(c125.389,87.731) v2@125.127,88.225 ; 124.849,87.876 cw(c125.389,87.731) v2@125.127,88.225
  Bottom Layer w0.3: v2(97.663,63.373) 98.011,63.721 121.202,63.721 ; v2@97.663,63.563 ccw(c97.663,64.022) 97.987,63.697 ; v2@97.663,63.563 ccw(c97.663,64.022) 97.987,63.697 ; v2@97.663,63.563 ccw(c97.663,64.022) 97.987,63.697 ; v2@97.853,63.373 cw(c98.312,63.373) 97.987,63.697 ; v2@97.853,63.373 cw(c98.312,63.373) 97.987,63.697 ; v2@97.853,63.373 cw(c98.312,63.373) 97.987,63.697
  Bottom Layer w0.35: v6@96.672,42.977 v6(96.901,42.977) 97.231,42.647 97.231,39.599 96.876,39.243 v2(96.876,37.49) ; v2@96.759,37.607 ccw(c96.477,37.889) 96.876,37.889 ; v2@96.759,37.607 ccw(c96.477,37.889) 96.876,37.889 ; v2@96.759,37.607 ccw(c96.477,37.889) 96.876,37.889 ; 96.876,37.889 ccw(c97.274,37.889) v2@96.992,37.607 ; 96.876,37.889 ccw(c97.274,37.889) v2@96.992,37.607 ; 96.876,37.889 ccw(c97.274,37.889) v2@96.992,37.607
CE: SPI1.6 SPI2.6 U1.12 | length 34.5
  Top Layer w0.254: U1.12@96.139,89.902 96.139,91.77 95.758,92.151 95.758,97.561 96.749,98.552 98.73,98.552 99.009,98.831 99.009,97.028 99.238,96.799 v2(99.238,95.402) ; 96.139,90.872 ccw(c96.644,90.872) U1.12@96.287,90.514 ; 96.139,90.872 ccw(c96.644,90.872) U1.12@96.287,90.514 ; 96.139,90.872 ccw(c96.644,90.872) U1.12@96.287,90.514 ; v2@99.087,95.553 ccw(c98.724,95.917) 99.238,95.917 ; v2@99.087,95.553 ccw(c98.724,95.917) 99.238,95.917 ; v2@99.087,95.553 ccw(c98.724,95.917) 99.238,95.917 ; 99.238,95.917 ccw(c99.752,95.917) v2@99.388,95.553 ; 99.238,95.917 ccw(c99.752,95.917) v2@99.388,95.553 ; 99.238,95.917 ccw(c99.752,95.917) v2@99.388,95.553
  Top Layer w0.7: 99.187,99.009 SPI1.6@99.187,100.032
  Bottom Layer w0.254: v2(99.238,95.402) 100.279,95.402 100.762,95.885 102.845,95.885 104.165,97.206 104.165,98.882 ; v2@99.388,95.252 cw(c99.752,94.888) 99.752,95.402 ; v2@99.388,95.252 cw(c99.752,94.888) 99.752,95.402 ; v2@99.388,95.252 cw(c99.752,94.888) 99.752,95.402 ; v2@99.388,95.553 ccw(c99.752,95.917) 99.752,95.402 ; v2@99.388,95.553 ccw(c99.752,95.917) 99.752,95.402 ; v2@99.388,95.553 ccw(c99.752,95.917) 99.752,95.402
  Bottom Layer w0.6: 103.95,101.803 103.95,99.098 104.165,98.882 ; SPI2.6@104.062,99.502 ccw(c104.547,99.264) 104.165,98.882 ; SPI2.6@104.062,99.502 ccw(c104.547,99.264) 104.165,98.882 ; SPI2.6@104.062,99.502 ccw(c104.547,99.264) 104.165,98.882
CMD2: 